# EAGLE board top (EAGLE 9.6.1)
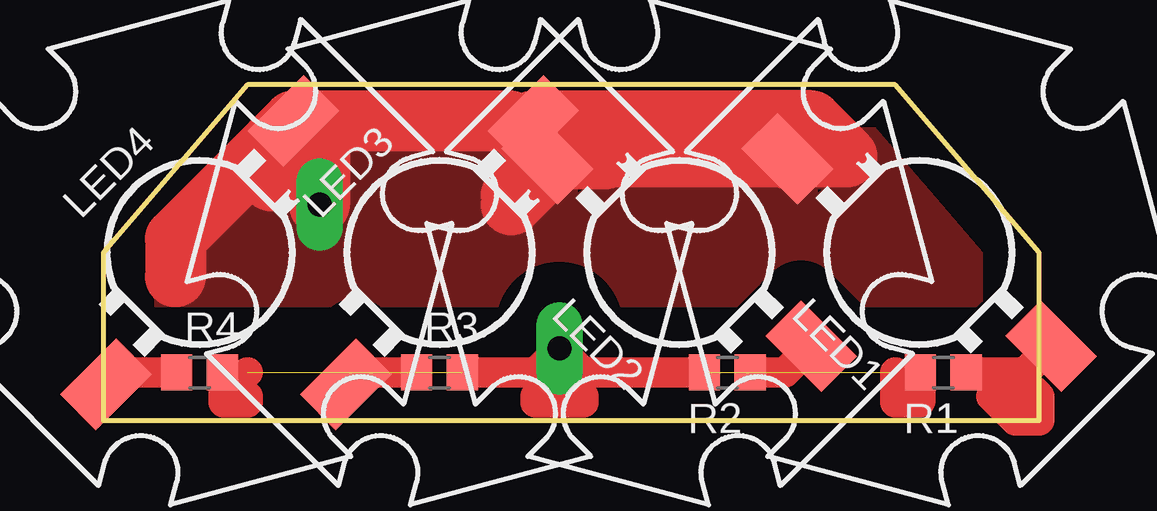
[diagram p0: board, top side]

Size 39 x 14 mm. Coordinates in mm from the lower left corner, seen from the top.
Outline: 0,0 39,0 39,7 33,14 6,14 0,7 0,0
Copper layers (1*16): Top 0.035mm / dielectric 1.5mm / Bottom 0.035mm
Design rules "default *": minimum track width 6mil, minimum drill 0.35mm, track to track 12mil, track to pad 12mil, pad to pad 12mil, via to via 12mil, smd to smd 12mil, copper to edge 1mil, drill to drill 6mil, minimum pad ring 10mil, minimum via ring 8mil, stop-mask expansion 4mil, vias tented up to drill 0mil, thermal gap 10mil

## Footprints (pad centres in the part's own frame; a part is rotated, then mirrored left to right if it is on the bottom)
Z-POWER-LED-PCB-TYPE = smd 3.3 x 2.1: A -6.65,-1.12; C 6.65,1.12
R0805 = smd 1.3 x 1.5: 1 -0.95,0; 2 0.95,0
PAD = drill 1 pad 1.93 long: P$1 0,0

## Placement (x,y rotation side)
LED1  Z-POWER-LED  [Z-POWER-LED-PCB-TYPE]  34,7 135 top
LED2  Z-POWER-LED  [Z-POWER-LED-PCB-TYPE]  24,7 135 top
LED3  Z-POWER-LED  [Z-POWER-LED-PCB-TYPE]  14,7 45 top
LED4  Z-POWER-LED  [Z-POWER-LED-PCB-TYPE]  4,7 45 top
R1  12  [R0805]  35,2 180 top
R2  12  [R0805]  26,2 180 top
R3  12  [R0805]  14,2 0 top
R4  12  [R0805]  4,2 0 top
U$1  PAD  [PAD]  9,9 90 top
U$2  PAD  [PAD]  19,3 90 top

## Library data of the parts
LED1-LED4 = led
R1-R4 = rcl-2
U$1 U$2 = connector

## Nets
+5V: R1.2 R2.2 R3.2 R4.2 U$2.P$1
GND: LED1.C LED2.C LED3.C LED4.C U$1.P$1
N$1: LED4.A R4.1
N$3: LED3.A R3.1
N$4: LED2.A R2.1
N$5: LED1.A R1.1

## Tracks (layer width: path | path; a pad name or v marks a point on that pad's centre or on a via)
+5V  (2 unrouted)
  Top 1.27: 18,2 R3.2 16,2 | 18,2 20,2 | 20,2 R2.2 | U$2.P$1 18,2 | U$2.P$1 20,2 | R4.2 5,1.95 5,1 | 5,1 6,1 6,0.76 5,0.76 5,1 | 5,1 6,2 | U$2.P$1 19,0.76 | 19,0.76 18,0.76 18,1 20,1 20,0.76 19,0.76 | R1.2 34.05,0.81 34,0.76 33,0.76 33,2
GND
  Top 1.27: LED3.C 17.42,12 | LED2.C 17.91,11.51 17.91,12.25 18.75,12.25 19,12
  Top 2.54: LED4.C 9,11.4 U$1.P$1 | LED4.C 7,11.58 7,10 7.91,10.91 LED4.C | LED4.C 16.92,12.49 17.91,11.51 | 18.75,12.25 18.75,10.75 17,9 17,9.4 LED2.C 20.91,10.91 21,11 31,11 29.51,12.49 26.92,12.49 | LED3.C 26.92,12.49 | 26.92,12.49 LED1.C | LED4.C 3,7.58 3,6
  pour Top (isolate 1.676): 0,14 0,6 39,6 39,14
N$1
  Top 1.27: LED4.A 0.58,2 R4.1
N$3
  Top 1.27: LED3.A 10.58,2 R3.1
N$4
  Top 1.27: LED2.A 28.41,2 R2.1
N$5
  Top 1.27: LED1.A 38.41,2 | 38.41,2 38.24,2 38,2 | 38,2 R1.1 | 38.41,2 38,1.6 38,1 38.24,0.76 38.24,1 | 38.41,2 38.41,1.6 39,1 39,0 38,0 37,1 38,2